# Altium PCB PCB Doc.PcbDoc (part 2 of 2)
Units mm, origin at the board's own origin, x right, y up, seen from the top; angles counter-clockwise.
Board outline 76.61 x 32.18 mm, 4 copper layers (Top Layer, Ground Planes, Power Planes, Bottom Layer), stack 0.778 mm thick; 49 components, 50 nets, 397 pads, 104 vias.
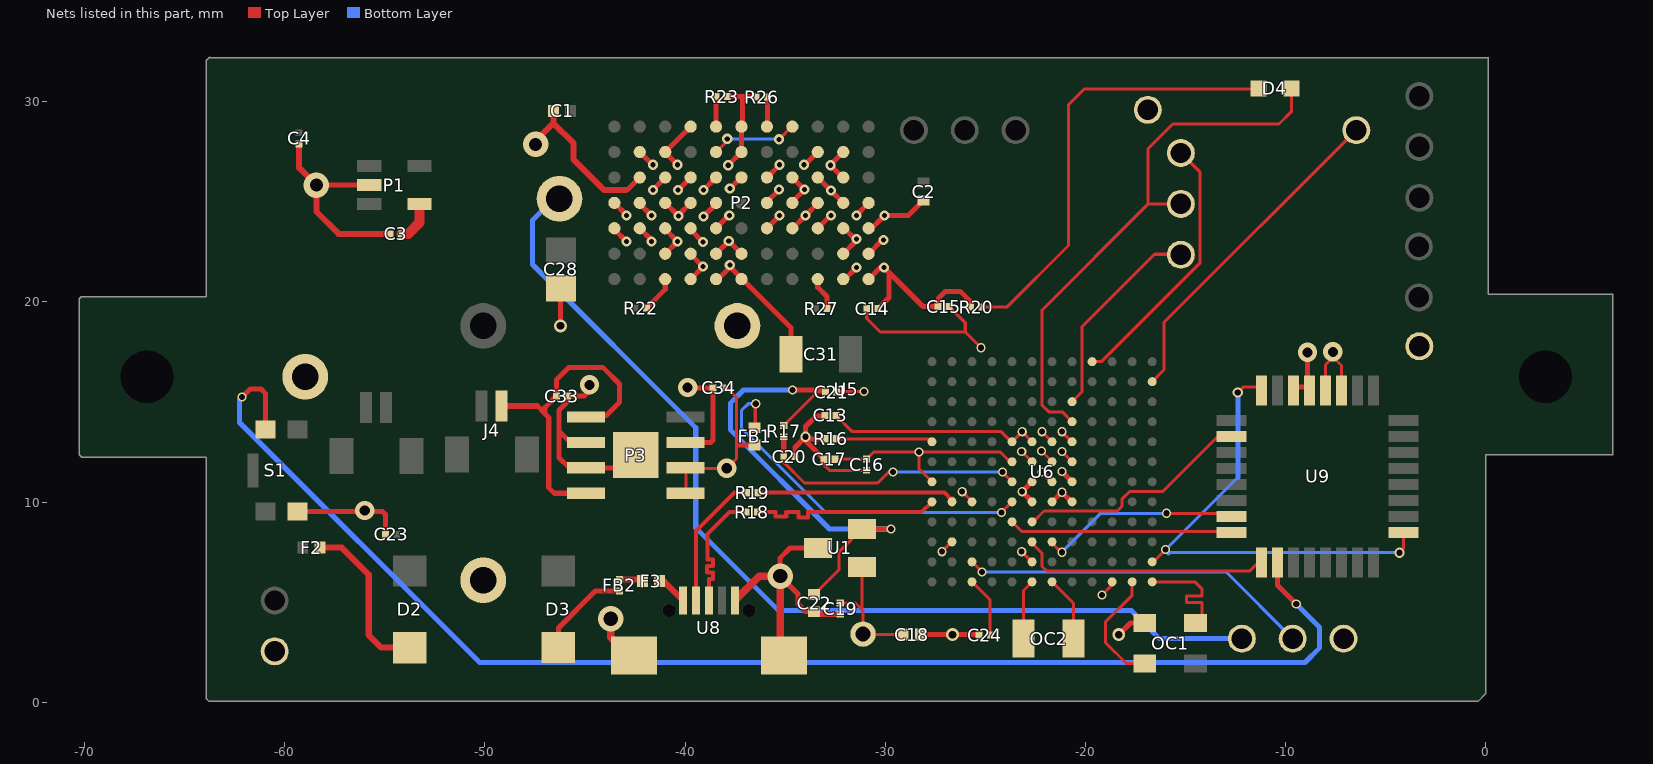
[diagram p4: the nets of this part, all layers, seen from the top]

## Via types
v1: diameter 0.508, hole 0.254, Top Layer to Bottom Layer, tented both sides, 36 vias
v2: diameter 0.457, hole 0.305, Top Layer to Bottom Layer, tented both sides, 23 vias
v3: diameter 0.635, hole 0.381, Top Layer to Bottom Layer, tented both sides, 15 vias
v4: diameter 0.965, hole 0.508, Top Layer to Bottom Layer, 7 vias
v5: diameter 0.457, hole 0.305, Top Layer to Bottom Layer, 7 vias
v6: diameter 1.016, hole 0.508, Top Layer to Bottom Layer, 4 vias
v7: diameter 1.27, hole 0.66, Top Layer to Bottom Layer, 3 vias
v8: diameter 0.508, hole 0.305, Top Layer to Bottom Layer, 3 vias
v9: diameter 0.635, hole 0.381, Top Layer to Bottom Layer, 3 vias
v10: diameter 1.27, hole 0.711, Top Layer to Bottom Layer, 2 vias
v11: diameter 0.635, hole 0.305, Top Layer to Bottom Layer, tented both sides, 1 vias

## Nets (pads, with @x,y where several pads share a name; then routed paths per layer and width w, separated by ;. In a path a pad name is that pad's centre, name@x,y a point inside that pad or via, vN(x,y) a via of type N, cw(c..) or ccw(c..) an arc to the next point about the centre after c; other vN are vias at no path point) (continued)
NetC3_1: C3.1 P1.4 | length 2.1
  Top Layer w0.508: C3.1@-54.177,23.393 -53.823,23.393 -53.274,23.942 P1.4@-53.274,24.882
NetC20_1: C20.1 R17.2 U6.G5 | length 13.5
  Top Layer w0.152: -35.079,11.99 -34.036,10.947 -30.378,10.947 -29.82,11.506 v5(-29.616,11.506) ; v2(-24.155,11.494) U6.G5@-23.673,11.011
  Top Layer w0.254: -35.079,11.99 C20.1@-35.079,12.268 C20.1@-35.079,12.268 R17.2@-35.077,13.259
  Bottom Layer w0.152: v5@-29.604,11.494 v2(-24.155,11.494)
  Bottom Layer w0.254: v5(-29.616,11.506) v5@-29.604,11.494
NetC21_2: C21.2 C22.1 R17.1 U1.2 | length 25
  Top Layer w0.152: R17.1@-35.077,13.819 -33.402,15.494 C21.2@-32.995,15.494 ; C22.1@-33.553,5.383 -32.309,6.628 -32.309,7.513 U1.2@-31.166,8.656
  Top Layer w0.254: v5(-34.646,15.596) -33.096,15.596 C21.2@-32.995,15.494 ; U1.2@-31.166,8.656 v5(-29.713,8.656)
  Bottom Layer w0.254: v5(-34.646,15.596) -37.084,15.596 -37.744,14.935 -37.744,13.614 -32.786,8.656 v5(-29.713,8.656)
NetC24_2: C24.2 U6.M3 | length 3
  Top Layer w0.152: U6.M3@-25.673,6.011 -24.765,5.104 C24.2@-24.765,3.353
NetC33_1: C33.1 J4.2 P3.5 P3.8 | length 16.6
  Top Layer w0.254: -47.392,14.804 -47.015,14.427 ; P3.8@-44.958,10.439 -46.533,10.439 -46.812,10.719 -46.812,14.224 -47.015,14.427 ; P3.5@-44.958,14.249 -44.882,14.326 -43.942,14.326 -43.282,14.986 -43.282,15.9 -44.094,16.713 -45.822,16.713 -46.432,16.102 C33.1@-46.432,15.291 -47.015,14.708 -47.015,14.427
  Top Layer w0.305: J4.2@-49.181,14.804 -47.392,14.804
NetD2_2: D2.2 F2.2 | length 8.2
  Top Layer w0.305: F2.2@-58.141,7.722 -57.15,7.722 -55.804,6.375 -55.804,3.353 -55.174,2.723 D2.2@-53.746,2.723
NetD3_2: D3.2 FB2.2 | length 4.8
  Top Layer w0.254: D3.2@-46.33,2.733 -46.33,3.708 -44.475,5.563 FB2.2@-43.282,5.563
NetD4_1: D4.1 pad.15@-15.24,24.892 U6.D8 | length 27.5
  Top Layer w0.152: U6.D8@-20.673,14.011 -21.165,14.503 -21.844,14.503 -22.174,14.834 -22.174,19.583 -16.866,24.892 ; pad.15@-15.24,24.892 -16.866,24.892 ; D4.1@-9.703,30.607 -9.703,29.515 -10.338,28.88 -15.646,28.88 -16.891,27.635 -16.891,24.917 -16.866,24.892
NetD4_2: D4.2 R20.1 | length 22.5
  Top Layer w0.152: R20.1@-25.189,19.736 -23.933,19.736 -20.853,22.816 -20.853,29.845 -20.066,30.632 D4.2@-11.328,30.632
NetF3_1: F3.1 FB2.1 | length 1.2
  Top Layer w0.254: F3.1@-42.216,6.123 F3.1@-42.139,6.045
  Top Layer w0.305: FB2.1@-43.282,6.123 F3.1@-42.216,6.123
NetF3_2: F3.2 U8.1 | length 1.6
  Top Layer w0.305: F3.2@-41.279,6.045 -41.07,6.045 U8.1@-40.111,5.087
NetFB1_2: FB1.2 U6.H5 | length 18.4
  Top Layer w0.152: FB1.2@-36.5,13.712 v5@-36.5,14.91 ; v2(-24.206,9.478) U6.H5@-23.673,10.011
  Bottom Layer w0.152: v5(-36.474,14.91) -36.855,14.91 -37.186,14.58 -37.186,13.691 -32.973,9.478 v2(-24.206,9.478)
NetOC1_1: OC1.1 U6.M12 | length 6
  Top Layer w0.152: U6.M12@-16.673,6.011 -14.546,6.011 -14.173,5.639 -14.173,5.309 -14.961,5.309 -14.961,4.978 -14.173,4.978 OC1.1@-14.173,4.293
  Top Layer w0.254: OC1.1@-14.503,3.962 OC1.1@-14.173,4.293
NetOC1_3: OC1.3 U6.M11 | length 6
  Top Layer w0.152: U6.M11@-17.673,6.011 -17.673,5.34 -18.999,4.013 -18.999,2.972 -17.958,1.93 OC1.3@-17.043,1.93
NetOC2_1: OC2.1 U6.M6 | length 3
  Top Layer w0.152: OC2.1@-23.099,3.175 -23.099,5.585 U6.M6@-22.673,6.011
NetOC2_2: OC2.2 U6.M7 | length 3.3
  Top Layer w0.152: U6.M7@-21.673,6.011 -20.599,4.938 OC2.2@-20.599,3.175
NetP2_C1: P2.C1 R22.2 | length 1.9
  Top Layer w0.254: R22.2@-41.934,19.685 -40.996,20.624 P2.C1@-40.996,21.133 ; P2.C1@-41.199,21.133 P2.C1@-41.165,21.057
NetP2_E6: P2.E6 P2.H7 | length 4.4
  Top Layer w0.152: P2.E6@-38.456,27.483 -38.43,27.483 -38.437,27.494 -37.897,28.035 v1(-37.897,28.143) ; v1(-35.306,28.118) -34.671,28.753 P2.H7@-34.646,28.753
  Bottom Layer w0.152: v1(-37.897,28.143) v1@-35.306,28.143
NetP2_E7: P2.E7 R23.1 | length 1.5
  Top Layer w0.152: P2.E7@-38.456,28.753 P2.E7@-38.456,28.753
  Top Layer w0.254: P2.E7@-38.456,28.753 R23.1@-38.457,30.251
NetP2_G7: P2.G7 R26.1 | length 1.5
  Top Layer w0.152: P2.G7@-35.916,28.753 P2.G7@-35.889,28.779
  Top Layer w0.254: P2.G7@-35.889,28.779 R26.1@-35.889,30.226
NetP2_J1: P2.J1 R27.2 | length 1.7
  Top Layer w0.254: P2.J1@-33.376,21.133 -33.376,20.726 -32.918,20.269 R27.2@-32.918,19.66
NetR16_1: R16.1 U6.E1 | length 4.8
  Top Layer w0.152: R16.1@-32.46,13.157 -27.819,13.157 U6.E1@-27.673,13.011
NetS1_4: S1.4 U9.18 | length 68.9
  Top Layer w0.254: v5(-62.128,15.24) -61.722,15.646 -61.189,15.646 -60.973,15.43 S1.4@-60.973,13.632 ; U9.18@-10.414,6.978 -10.414,5.842 v5(-9.474,4.902)
  Bottom Layer w0.254: v5(-62.128,15.24) -62.255,15.113 -62.255,13.97 -50.267,1.981 -9.042,1.981 -8.306,2.718 -8.306,3.734 v5(-9.474,4.902)
NetU5_3: pad.@-12.192,3.175 U5.3 | length 50.1
  Bottom Layer w0.254: U5.3@-46.33,25.375 -47.625,24.079 -47.625,21.869 -39.472,13.716 -39.472,8.712 -35.331,4.572 -17.704,4.572 -16.307,3.175 pad.@-12.192,3.175
NetU6_A9: pad.@-15.24,27.432 U6.A9 | length 13.3
  Top Layer w0.152: U6.A9@-19.673,17.011 -19.209,17.011 -14.275,21.946 -14.275,26.467 pad.@-15.24,27.432
NetU6_B12: pad.@-6.477,28.575 U6.B12 | length 16.8
  Top Layer w0.152: U6.B12@-16.673,16.011 -16.078,16.606 -16.078,18.974 pad.@-6.477,28.575
NetU6_C8: pad.16@-15.24,22.352 U6.C8 | length 10.5
  Top Layer w0.152: U6.C8@-20.673,15.011 -20.168,15.517 -20.168,18.771 -16.561,22.377 -15.85,22.377 pad.16@-15.367,22.86
NetU6_J5: U6.J5 U9.16 | length 11.2
  Top Layer w0.152: U6.J5@-23.673,9.011 -23.196,8.534 U9.16@-12.817,8.534
  Top Layer w0.254: U9.16@-12.817,8.534 U9.16@-12.714,8.637
NetU6_J6: U6.J6 U9.10 | length 12
  Top Layer w0.152: U6.J6@-22.612,9.011 -22.073,9.55 -18.415,9.55 -18.186,9.779 -18.186,10.135 -17.805,10.516 -16.154,10.516 -13.233,13.437 U9.10@-12.714,13.437
  Top Layer w0.254: U6.J6@-22.673,9.011 U6.J6@-22.612,9.011
NetU6_K6: U6.K6 U9.17 | length 12.7
  Top Layer w0.152: U6.K6@-22.673,7.941 -22.174,7.442 -22.174,6.782 -21.946,6.553 -11.798,6.553 U9.17@-11.214,7.137
  Top Layer w0.254: U6.K6@-22.673,7.941 U6.K6@-22.673,8.011
NetU6_K7: U6.K7 U9.15 | length 10
  Top Layer w0.152: U6.K7@-21.673,7.957 -21.209,7.493 v2(-21.184,7.493) ; v2(-15.951,9.437) U9.15@-12.707,9.437
  Top Layer w0.254: U6.K7@-21.673,7.957 U6.K7@-21.673,8.011
  Bottom Layer w0.152: v2(-21.184,7.493) -19.239,9.437 v2(-15.951,9.437)
NetU6_L3: pad.18 U6.L3 | length 17.6
  Top Layer w0.152: U6.L3@-25.673,7.011 -25.171,6.51 v2(-25.171,6.502)
  Bottom Layer w0.152: v2(-25.171,6.502) -12.979,6.502 pad.18@-9.652,3.175
NetU6_L12: U6.L12 U9.8 U9.25 | length 24.6
  Top Layer w0.152: U6.L12@-16.611,7.011 v2(-16.002,7.62) ; v8(-12.395,15.469) -12.126,15.737 U9.8@-11.207,15.737 ; v8(-4.318,7.468) -4.114,7.672 U9.25@-4.114,8.637
  Top Layer w0.254: U6.L12@-16.673,7.011 U6.L12@-16.611,7.011
  Bottom Layer w0.152: v2(-16.002,7.62) -12.395,11.227 ; v2@-15.85,7.468 v8(-4.318,7.468)
  Bottom Layer w0.254: v2(-16.002,7.62) v2@-15.85,7.468 ; -12.395,11.227 v8(-12.395,15.469)
usb_N: R19.1 U6.H2 | length 9.9
  Top Layer w0.203: R19.1@-36.372,10.465 -27.051,10.465 U6.H2@-26.673,10.087
  Top Layer w0.381: U6.H2@-26.673,10.011 U6.H2@-26.673,10.087
usb_P: R18.1 U6.H1 | length 10
  Top Layer w0.203: R18.1@-36.397,9.5 -35.484,9.5 -35.484,9.271 -34.95,9.271 -34.95,9.5 -34.341,9.5 -34.341,9.22 -33.858,9.22 -33.858,9.5 -28.185,9.5 U6.H1@-27.673,10.011
USBD_N: R19.2 U8.2 | length 6.8
  Top Layer w0.203: U8.2@-39.461,5.087 -39.461,8.545 -37.541,10.465 R19.2@-36.932,10.465
USBD_P: R18.2 U8.3 | length 6.8
  Top Layer w0.203: U8.3@-38.811,5.087 -38.811,6.147 -38.608,6.147 -38.608,6.477 -38.913,6.477 -38.913,6.807 -38.608,6.807 -38.608,7.137 -38.887,7.137 -38.887,8.407 -37.795,9.5 R18.2@-36.957,9.5
VDD: C13.1 C14.1 C15.1 C16.1 C17.1 C18.2 C19.1 C34.1 FB1.1 P3.1 P3.2 pad.@-31.115,3.404 U1.1 U6.E5 U6.E6 U6.E7 U6.E8 U6.F5 U6.F8 U6.G1 U6.L6 U9.3 U9.4 | length 52.5
  Top Layer w0.152: P3.1@-39.954,10.312 -39.954,11.684 v4(-37.922,11.684) -37.44,12.167 -37.44,15.215 C34.1@-37.986,15.761 ; C17.1@-32.511,12.141 C16.1@-30.937,12.142 ; C13.1@-32.461,14.326 -31.648,13.513 -24.206,13.513 -23.705,13.011 U6.E5@-23.673,13.011 -23.666,13.011 v2(-23.165,13.513) -23.165,13.503 U6.E6@-22.673,13.011 ; C19.1@-32.258,4.953 -31.496,4.953 -31.166,4.623 ; U1.1@-31.166,7.163 U1.1@-31.166,6.756 -31.166,4.623 ; C16.1@-30.937,12.142 -30.583,12.497 v2(-28.321,12.497) ; C14.1@-30.931,19.66 -30.931,19.17 -30.251,18.491 -26.01,18.491 ; C18.2@-29.105,3.378 -30.912,3.378 pad.@-31.115,3.404 -31.115,4.572 -31.166,4.623 ; U6.G1@-27.673,11.011 -28.321,11.66 v2(-28.321,12.497) ; C15.1@-26.815,19.761 -26.01,18.956 -26.01,18.491 ; v2(-25.222,17.704) -26.01,18.491 ; U6.F5@-23.673,12.011 -23.772,12.011 -24.257,12.497 v2(-28.321,12.497) ; v2(-23.19,7.518) -22.683,7.011 U6.L6@-22.673,7.011 ; v2(-22.174,13.513) U6.E7@-21.673,13.011 ; v2(-21.184,12.522) U6.F8@-20.673,12.011 ; v2(-21.184,13.513) -20.682,13.011 U6.E8@-20.673,13.011 ; U9.4@-8.014,15.578 -8.014,16.853 -7.645,17.221 v4@-7.645,17.247 ; v4(-7.645,17.501) v4@-7.645,17.247 ; U9.3@-7.214,15.737 -7.214,16.815 v4@-7.645,17.247
  Top Layer w0.254: -37.389,12.852 FB1.1@-36.525,12.852
VSSA: C1.2 C2.2 C3.2 C4.1 C13.2 C14.2 C15.2 C16.2 C17.2 C18.1 C19.2 C20.2 C21.1 C22.2 C23.2 C24.1 C28.2 C31.1 C33.2 C34.2 OC1.2 P1.2 P2.A3 P2.A4 P2.B3 P2.B4 P2.B5 P2.B6 P2.C2 P2.C3 P2.C4 P2.C5 P2.C6 P2.D1 P2.D2 P2.D3 P2.D4 P2.D5 P2.D7 P2.E1 P2.E2 P2.E3 P2.E4 P2.E5 P2.F1 P2.F2 P2.F5 P2.F6 P2.F7 P2.G3 P2.G4 P2.G5 P2.H3 P2.H4 P2.H5 P2.J3 P2.J4 P2.J5 P2.J6 P2.K1 P2.K2 P2.K3 P2.K4 P2.K5 P2.K6 P2.L1 P2.L2 P2.L3 P2.L4 P3.3 P3.6 P3.7 P3.9 pad.15@-60.503,2.54 pad.16@-3.327,17.78 pad.@-7.112,3.175 pad.@-16.891,29.591 R16.2 R20.2 R23.2 R26.2 S1.2 U1.3 U5.2 U5.4 U5.5 U6.F6 U6.F7 U6.G6 U6.G7 U6.G8 U6.H3 U6.H6 U6.H7 U6.H8 U6.K2 U6.M10 U8.5 U8.6 U8.7 U9.5 U9.6 | length 145.2
  Top Layer w0.152: P2.A3@-43.536,23.622 P2.A3@-43.536,23.673 ; -42.951,25.578 -42.901,25.578 ; v1(-42.926,24.308) v1@-42.926,24.333 ; P2.B4@-42.266,24.892 P2.B4@-42.266,24.943 ; v1(-41.681,23.012) v1@-41.681,23.089 ; v1@-41.631,26.848 v1(-41.605,26.848) ; v1(-41.605,25.578) v1@-41.605,25.603 ; P2.C3@-40.996,23.622 P2.C3@-40.996,23.673 ; P2.C6@-40.996,27.457 P2.C6@-40.996,27.483 ; v1(-40.335,24.282) v1@-40.335,24.333 ; P2.D2@-39.726,22.377 P2.D2@-39.726,22.403 ; P2.D3@-39.726,23.597 P2.D3@-39.726,23.673 ; v1@-39.116,21.742 v1(-39.116,21.768) ; P2.E1@-38.456,21.133 P2.E1@-38.405,21.133 ; P2.E2@-38.456,22.352 P2.E2@-38.456,22.403 ; P2.E4@-38.456,24.892 P2.E4@-38.456,24.943 ; v1@-37.821,24.308 v1(-37.795,24.308) ; P2.F1@-37.236,21.133 P2.F1@-37.186,21.133 ; P2.F5@-37.211,26.213 P2.F5@-37.186,26.213 ; P2.F2@-37.186,22.352 P2.F2@-37.186,22.403 ; P2.F7@-37.186,28.753 P2.F7@-37.135,28.804 ; P2.G4@-35.916,24.943 P2.G4@-35.916,24.994 ; P2.H3@-34.646,23.673 P2.H3@-34.62,23.673 ; P2.H4@-34.646,24.943 P2.H4@-34.646,24.994 ; v1(-34.061,26.848) v1@-34.011,26.848 ; P2.J4@-33.376,24.917 P2.J4@-33.376,24.943 ; C17.2@-33.071,12.141 -33.071,11.862 -32.791,11.582 C16.2@-30.937,11.582 ; v1(-32.741,26.822) v1@-32.741,26.848 ; C21.1@-32.435,15.494 -32.409,15.519 v5(-31.064,15.519) ; P2.K5@-32.131,26.213 P2.K5@-32.106,26.213 ; P2.K1@-32.106,21.133 P2.K1@-32.029,21.133 ; P2.K3@-32.106,23.673 P2.K3@-32.055,23.673 ; v1@-30.251,21.717 v1(-30.074,21.717) ; v1@-30.15,23.089 v1(-30.099,23.089) ; v2(-27.178,7.518) U6.K2@-26.685,8.011 ; v2(-26.162,10.516) U6.H3@-25.673,10.026 ; v2(-23.19,12.522) U6.F6@-22.679,12.011 ; v2(-22.2,12.548) U6.F7@-21.673,12.021 ; v2(-19.177,5.359) -18.673,5.864 U6.M10@-18.673,6.011
  Top Layer w0.254: S1.2@-59.373,9.532 -55.125,9.532 -54.967,9.374 C23.2@-54.967,8.382 ; v7(-58.42,25.832) P1.2@-55.784,25.832 ; v9(-46.228,18.796) -46.228,20.615 C28.2@-46.177,20.665 ; P3.6@-44.958,12.979 -45.745,12.979 -46.304,13.538 ; v4(-44.78,15.85) -44.78,15.545 -45.034,15.291 C33.2@-45.872,15.291 -45.872,15.011 -46.304,14.58 -46.304,13.538 ; P2.A3@-43.536,23.622 v1(-42.926,23.012) ; P2.A4@-43.536,24.943 v1@-42.926,24.333 ; -42.901,25.578 P2.B5@-42.266,26.213 ; U8.6@-42.799,2.337 U8.6@-42.561,2.337 ; P3.9@-42.469,12.344 -43.104,11.709 P3.7@-44.958,11.709 -45.796,11.709 -46.304,12.217 -46.304,13.538 ; P2.B3@-42.266,23.673 v1@-41.681,23.089 ; P2.B4@-42.266,24.892 v1(-41.681,24.308) ; P2.B6@-42.266,27.483 v1@-41.631,26.848 ; v1@-41.605,25.603 P2.C5@-40.996,26.213 ; P2.C2@-40.996,22.403 v1(-40.386,23.012) P2.C3@-40.996,23.622 ; P2.C4@-40.996,24.943 v1(-40.335,24.282) ; P2.C6@-40.996,27.457 v1(-40.386,26.848) ; P2.C6@-40.996,27.483 P2.D7@-39.726,28.753 ; v1(-40.361,25.578) P2.D5@-39.726,26.213 ; v1@-40.335,24.333 P2.D4@-39.726,24.943 ; P3.3@-39.98,12.979 -38.71,12.979 -38.609,13.08 C34.2@-38.609,15.697 -39.853,15.697 v4(-39.878,15.723) ; P2.D1@-39.726,21.133 v1@-39.116,21.742 ; P2.D2@-39.726,22.377 v1(-39.116,21.768) ; P2.D3@-39.726,23.597 v1(-39.116,22.987) ; v1(-39.091,24.257) P2.E4@-38.456,24.892 ; v1(-39.091,25.578) P2.E5@-38.456,26.213 ; P2.E1@-38.456,21.133 -38.456,21.031 -37.77,21.717 v1@-37.77,21.768 ; P2.E2@-38.456,22.403 v1(-37.821,23.038) P2.F2@-37.186,22.403 ; P2.E3@-38.456,23.673 v1@-37.821,24.308 ; R23.2@-37.897,30.251 -37.135,30.251 ; v1(-37.846,26.822) P2.F6@-37.186,27.483 P2.F7@-37.186,28.753 ; v1(-37.77,21.844) v1@-37.77,21.768 ; v1(-37.77,25.654) P2.F5@-37.211,26.213 ; P2.F7@-37.135,28.804 -37.135,30.251 ; R26.2@-36.449,30.226 -36.474,30.251 -37.135,30.251 ; P2.G3@-35.916,23.673 v1(-35.281,24.308) ; P2.G4@-35.916,24.994 v1(-35.306,25.603) ; P2.G5@-35.916,26.213 v1(-35.281,26.848) ; v10@-35.255,6.225 v10(-35.255,6.299) ; C31.1@-34.722,17.374 -34.722,18.72 v1@-37.77,21.768 ; P2.H4@-34.646,24.994 v1(-34.036,25.603) P2.H5@-34.646,26.213 ; P2.H3@-34.62,23.673 v1(-33.985,24.308) P2.J4@-33.376,24.917 ; C20.2@-34.519,12.268 -34.519,12.725 v8(-33.985,13.259) ; v1@-34.011,26.848 P2.J6@-33.376,27.483 ; P2.J3@-33.376,23.673 -32.728,24.32 v1(-32.715,24.308) ; P2.J5@-33.376,26.213 v1(-32.715,25.552) P2.K4@-32.106,24.943 ; U1.3@-33.366,7.706 -34.762,7.706 -35.255,7.214 v10(-35.255,6.299) ; C13.2@-33.096,14.3 -33.452,14.3 -33.985,13.767 v8(-33.985,13.259) ; C17.2@-33.071,12.141 -33.985,13.056 v8(-33.985,13.259) ; R16.2@-33.02,13.157 -33.884,13.157 v8(-33.985,13.259) ; v1(-32.741,26.822) P2.K5@-32.131,26.213 ; v1@-32.741,26.848 P2.K6@-32.106,27.483 ; C19.2@-32.258,4.393 -33.423,4.393 C22.2@-33.553,4.523 -33.987,4.523 -34.366,4.902 -34.366,5.41 v10(-35.255,6.299) ; P2.K2@-32.106,22.403 -31.445,23.063 P2.K3@-32.055,23.673 ; P2.K1@-32.029,21.133 v1(-31.445,21.717) ; v1(-31.445,24.308) -31.445,24.333 P2.L4@-30.836,24.943 ; P2.L1@-30.836,21.133 v1@-30.251,21.717 ; P2.L2@-30.836,22.403 v1@-30.15,23.089 ; P2.L3@-30.836,23.673 -30.836,23.52 v1(-30.048,24.308) -28.856,24.308 C2.2@-28.092,25.072 ; C14.2@-30.371,19.66 -29.82,20.211 -29.82,21.463 ; v1(-30.074,21.717) -29.82,21.463 ; C18.1@-28.219,3.353 C18.1@-28.245,3.378 v9(-26.645,3.378) -25.35,3.378 C24.1@-25.325,3.353 ; C15.2@-27.375,19.761 -28.118,19.761 -29.82,21.463 ; C15.2@-27.354,19.85 -27.354,20.169 -27,20.523 -26.264,20.523 -25.749,20.009 R20.2@-25.749,19.736 ; U6.K2@-26.685,8.011 U6.K2@-26.673,8.011 ; U6.H3@-25.673,10.011 U6.H3@-25.673,10.026 ; U6.F6@-22.679,12.011 U6.F6@-22.673,12.011 ; U6.H6@-22.673,10.011 -22.673,10.024 v2(-23.165,10.516) -23.165,10.519 U6.G6@-22.673,11.011 ; v2(-22.174,11.506) -21.679,11.011 U6.G7@-21.673,11.011 ; U6.H7@-21.673,10.011 -21.662,10.011 v2(-21.184,10.49) -20.705,10.011 U6.H8@-20.673,10.011 ; U6.F7@-21.673,12.011 U6.F7@-21.673,12.021 ; v2(-21.184,11.532) -21.184,11.522 U6.G8@-20.673,11.011 ; v9(-18.339,3.378) -17.755,3.962 OC1.2@-17.043,3.962 ; U9.6@-9.614,15.737 -8.814,15.737 -8.915,15.839 v4(-8.915,17.475)
  Top Layer w0.305: C4.1@-59.284,27.889 -59.284,26.695 v7(-58.42,25.832) -58.42,24.511 -57.302,23.393 C3.2@-54.737,23.393 ; v7(-47.473,27.864) -47.647,27.864 -46.582,28.929 ; C1.2@-46.582,29.54 -46.582,28.929 ; -42.951,25.578 -44.044,25.578 -45.568,27.102 -45.568,27.915 -46.582,28.929
  Top Layer w0.381: v10(-43.713,4.166) -43.713,3.251 U8.6@-42.799,2.337 ; U8.5@-37.511,5.087 -36.299,6.299 v10(-35.255,6.299) ; v10@-35.255,6.225 -35.255,2.531 U8.7@-35.061,2.337
  other v1: -31.445,23.139
  other v4: -56.007,9.576
pads on no net: J3. J4. OC1.4 P2.C7 P2.D6 P2.F3 P2.F4 P2.G6 P2.H6 P2.J7 P3.4 S1.1 S1.3 S1.5 U5. U6.A1 U6.A2 U6.A3 U6.A4 U6.A5 U6.A6 U6.A7 U6.A8 U6.A10 U6.A11 U6.A12 U6.B1 U6.B2 U6.B3 U6.B4 U6.B5 U6.B6 U6.B7 U6.B8 U6.B9 U6.B10 U6.B11 U6.C1 U6.C2 U6.C3 U6.C4 U6.C5 U6.C6 U6.C7 U6.C9 U6.C10 U6.C11 U6.C12 U6.D1 U6.D2 U6.D3 U6.D5 U6.D6 U6.D7 U6.D9 U6.D10 U6.E2 U6.E3 U6.E4 U6.E9 U6.E10 U6.F1 U6.F2 U6.F3 U6.F4 U6.F9 U6.F10 U6.F11 U6.F12 U6.G2 U6.G3 U6.G4 U6.G9 U6.G10 U6.G11 U6.G12 U6.H4 U6.H9 U6.H10 U6.H11 U6.H12 U6.J1 U6.J2 U6.J3 U6.J4 U6.J7 U6.J8 U6.J9 U6.J10 U6.J11 U6.J12 U6.K1 U6.K3 U6.K4 U6.K5 U6.K8 U6.K9 U6.K10 U6.K11 U6.K12 U6.L1 U6.L2 U6.L4 U6.L5 U6.L7 U6.L8 U6.L9 U6.L10 U6.L11 U6.M1 U6.M2 U6.M4 U6.M5 U6.M8 U6.M9 U8.4 U8.None U9.1 U9.2 U9.7 U9.9 U9.11 U9.12 U9.13 U9.14 U9.19 U9.20 U9.21 U9.22 U9.23 U9.24 U9.26 U9.27 U9.28 U9.29 U9.30 U9.31 U9.32
copper on no net: | length 0
  Top Layer w0.254: -20.673,16.011 -20.673,16.025
  other v4: -43.459,19.177

## Polygon pours and split planes (outlines as drawn)
VSSA on Ground Planes (split plane): -0.396,20.384 -0.386,20.284 -0.357,20.189 -0.31,20.1 -0.246,20.023 -0.169,19.959 -0.081,19.912 0.015,19.883 0.115,19.873 5.827,19.873 5.827,12.867 -0.012,12.867 -0.112,12.857 -0.208,12.828 -0.296,12.781 -0.373,12.718 -0.437,12.64 -0.484,12.552 -0.513,12.456 -0.523,12.357 -0.523,0.638 -0.612,0.548 -19.86,0.548 -19.86,7.899 -19.87,7.949 -19.898,7.991 -22.146,10.239 -22.146,10.566 -22.156,10.616 -22.184,10.658 -22.226,10.686 -22.276,10.696 -22.325,10.686 -22.367,10.658 -22.395,10.616 -22.405,10.566 -22.405,10.185 -22.395,10.136 -22.367,10.094 -20.119,7.846 -20.119,0.548 -63.409,0.548 -63.409,12.23 -63.419,12.329 -63.448,12.425 -63.495,12.513 -63.559,12.591 -63.636,12.654 -63.724,12.701 -63.777,12.717 -63.777,19.124 -54.46,19.124 -52.314,16.977 -52.272,16.949 -52.222,16.939 -43.866,16.939 -43.816,16.949 -43.774,16.977 -40.104,20.648 -36.833,20.648 -35.639,19.454 -35.639,10.038 -37.176,8.501 -37.267,8.41 -44.755,8.41 -44.804,8.4 -44.846,8.372 -45.786,7.432 -45.814,7.39 -45.824,7.341 -45.824,3.531 -45.814,3.481 -45.786,3.439 -44.567,2.22 -44.525,2.192 -44.475,2.182 -25.248,2.182 -25.198,2.192 -25.156,2.22 -23.48,3.896 -23.452,3.938 -23.442,3.988 -23.442,6.426 -23.452,6.476 -23.48,6.518 -24.966,8.004 -24.966,9.802 -23.772,10.996 -23.012,10.996 -22.963,11.006 -22.921,11.034 -22.893,11.076 -22.883,11.125 -22.893,11.175 -22.921,11.217 -22.963,11.245 -23.012,11.255 -23.825,11.255 -23.875,11.245 -23.917,11.217 -25.187,9.947 -25.215,9.905 -25.225,9.855 -25.225,7.95 -25.215,7.901 -25.187,7.859 -23.701,6.373 -23.701,4.041 -25.301,2.441 -44.422,2.441 -45.565,3.584 -45.565,7.287 -44.701,8.151 -37.213,8.151 -37.164,8.161 -37.122,8.189 -36.992,8.318 -35.418,9.893 -35.39,9.935 -35.38,9.985 -35.38,19.507 -35.39,19.557 -35.418,19.599 -36.688,20.869 -36.73,20.897 -36.779,20.907 -40.157,20.907 -40.207,20.897 -40.249,20.869 -43.919,17.198 -52.169,17.198 -54.315,19.345 -54.357,19.373 -54.407,19.383 -63.777,19.383 -63.777,19.769 -63.724,19.785 -63.636,19.832 -63.559,19.896 -63.495,19.973 -63.448,20.062 -63.419,20.157 -63.409,20.257 -63.409,31.684 -0.396,31.684
VSSA on Ground Planes (split plane): -64.036,12.74 -69.759,12.74 -69.759,19.746 -64.036,19.746
12V on Power Planes (split plane): -24.996,29.487 -24.996,27.889 -24.986,27.84 -24.958,27.798 -24.349,27.188 -24.307,27.16 -24.257,27.15 -23.98,27.15 -23.98,22.888 -29.67,17.198 -52.449,17.198 -52.449,19.126 -52.449,19.962 -48.816,23.594 -45.669,23.594 -45.62,23.604 -45.578,23.632 -44.371,24.839 -36.629,24.839 -36.629,20.726 -36.619,20.677 -36.591,20.635 -36.058,20.101 -36.016,20.073 -35.966,20.064 -30.277,20.064 -30.227,20.073 -30.185,20.101 -27.188,23.099 -27.16,23.141 -27.15,23.19 -27.15,29.69 -26.972,29.868 -25.377,29.868
-12V on Power Planes (split plane): -27.371,29.835 -27.399,29.793 -27.409,29.743 -27.409,23.244 -30.33,20.322 -35.913,20.322 -36.37,20.78 -36.37,24.839 -30.81,24.839 -30.761,24.849 -30.719,24.877 -29.525,26.07 -29.497,26.112 -29.487,26.162 -29.487,29.36 -28.979,29.868 -27.338,29.868
VDD on Power Planes (split plane): -0.396,20.384 -0.386,20.284 -0.357,20.189 -0.31,20.1 -0.246,20.023 -0.169,19.959 -0.081,19.912 0.015,19.883 0.115,19.873 5.827,19.873 5.827,12.867 -0.012,12.867 -0.112,12.857 -0.208,12.828 -0.296,12.781 -0.373,12.718 -0.437,12.64 -0.484,12.552 -0.513,12.456 -0.523,12.357 -0.523,0.638 -0.612,0.548 -52.449,0.548 -52.449,16.939 -29.616,16.939 -29.567,16.949 -29.525,16.977 -23.759,22.743 -23.731,22.785 -23.721,22.835 -23.721,27.15 -22.936,27.15 -22.887,27.16 -22.845,27.188 -22.184,27.848 -22.156,27.89 -22.146,27.94 -22.146,31.684 -0.396,31.684
Batt_Vin on Power Planes (split plane): -22.405,27.994 -22.99,27.409 -24.203,27.409 -24.737,27.943 -24.737,29.54 -24.747,29.59 -24.775,29.632 -25.232,30.089 -25.274,30.117 -25.324,30.127 -29.032,30.127 -29.082,30.117 -29.124,30.089 -29.708,29.505 -29.736,29.463 -29.746,29.413 -29.746,26.216 -30.864,25.098 -44.425,25.098 -44.474,25.088 -44.516,25.06 -45.723,23.853 -48.87,23.853 -48.919,23.843 -48.961,23.815 -52.67,20.107 -52.698,20.065 -52.707,20.015 -52.707,19.256 -63.777,19.256 -63.777,19.769 -63.724,19.785 -63.636,19.832 -63.559,19.896 -63.495,19.973 -63.448,20.062 -63.419,20.157 -63.409,20.257 -63.409,31.684 -22.405,31.684
no net on Power Planes (split plane): -64.036,19.126 -64.036,12.74 -69.759,12.74 -69.759,19.746 -64.036,19.746
Battery on Power Planes (split plane): -52.707,0.548 -63.409,0.548 -63.409,12.23 -63.419,12.329 -63.448,12.425 -63.495,12.513 -63.559,12.591 -63.636,12.654 -63.724,12.701 -63.777,12.717 -63.777,18.997 -52.707,18.997

## Other copper
Ground Planes (plane layer: these items are gaps in the copper):
  lines w0.025: -63.906,12.243 -63.906,19.253
  lines w0.254: -63.906,12.243 -63.906,20.244 ; -63.906,19.253 -62.916,19.253 -54.407,19.253 -52.222,17.069 -43.866,17.069 -40.157,20.777 -36.779,20.777 -35.509,19.507 -35.509,9.985 -37.084,8.41 -37.213,8.28 -44.755,8.28 -45.695,7.341 -45.695,3.531 -44.475,2.311 -25.248,2.311 -23.571,3.988 -23.571,6.426 -25.095,7.95 -25.095,9.855 -23.825,11.125 -23.012,11.125 ; -22.276,10.566 -22.276,10.185 -19.99,7.899 -19.99,0.038
Power Planes (plane layer: these items are gaps in the copper):
  lines w0.025: -63.906,12.243 -63.906,0.178 -63.779,0.051 -52.578,0.051 -52.578,17.069 ; -63.906,20.244 -63.906,32.055 -63.779,32.182 -63.754,32.207 ; -37.414,32.182 -37.389,32.207
  lines w0.254: -63.906,12.243 -63.906,19.126 ; -63.906,20.244 -63.906,19.126 ; -52.578,0.051 -52.578,19.126 ; -52.578,17.069 -29.616,17.069 -23.851,22.835 -23.851,27.28 -24.257,27.28 -24.867,27.889 -24.867,29.54 -25.324,29.997 -29.032,29.997 -29.616,29.413 -29.616,26.162 -30.81,24.968 -44.425,24.968 -45.669,23.724 -48.87,23.724 -52.578,20.015 -52.578,19.126 ; -36.5,24.968 -36.5,20.726 -35.966,20.193 -30.277,20.193 -27.28,23.19 -27.28,29.743 -27.026,29.997 ; -23.955,27.28 -22.936,27.28 -22.276,27.94 -22.276,31.763 -22.708,32.195 ; -63.906,19.126 -52.578,19.126 ; -63.906,19.126 -56.337,19.126 -52.578,19.126

## Silkscreen, mask and mechanical layers (free items; w line width, h text height)
Top Overlay:
  drawing of 368 lines, arcs and shapes, not listed
  text "30" at -5.232,30.048 h0.51
  text "GND" at -16.053,29.972 h0.51
  text "ADC" at -8.941,28.397 h0.51
  text "14" at -5.08,27.457 h0.51
  text "-12" at -29.312,27.026 h0.51 r359.36
  text "12" at -26.416,27 h0.51 r0.49
  text "5" at -23.647,27 h0.51
  text "CS" at -13.31,26.975 h0.51 r90
  text "29" at -5.232,24.994 h0.51
  text "SCLK" at -13.31,23.978 h0.51 r90
  text "32" at -5.283,22.53 h0.51
  text "MOSI" at -13.31,21.336 h0.51 r90
  text "31" at -5.055,20.015 h0.51
  text "GND" at -5.994,17.424 h0.51
  text "VIN" at -62.738,3.429 h0.51
  text "DAC" at -8.153,2.489 h0.51 r90
  text "GND" at -5.563,2.489 h0.51 r89.36
  text "5V DAC" at -10.668,1.524 h0.51 r90
Mechanical 1:
  lines w0.025: -70.256,12.37 -70.256,20.142 -70.155,20.244 -63.983,20.244 -63.906,20.244 -63.906,32.055 -63.779,32.182 0.102,32.182 0.102,20.371 6.325,20.371 6.325,12.37 -0.025,12.37 -0.025,0.432 -0.406,0.051 -63.195,0.051 -63.779,0.051 -63.906,0.178 -63.906,12.243 -70.129,12.243 -70.256,12.37